# Allegro board Sensor_RevA2-1.brd
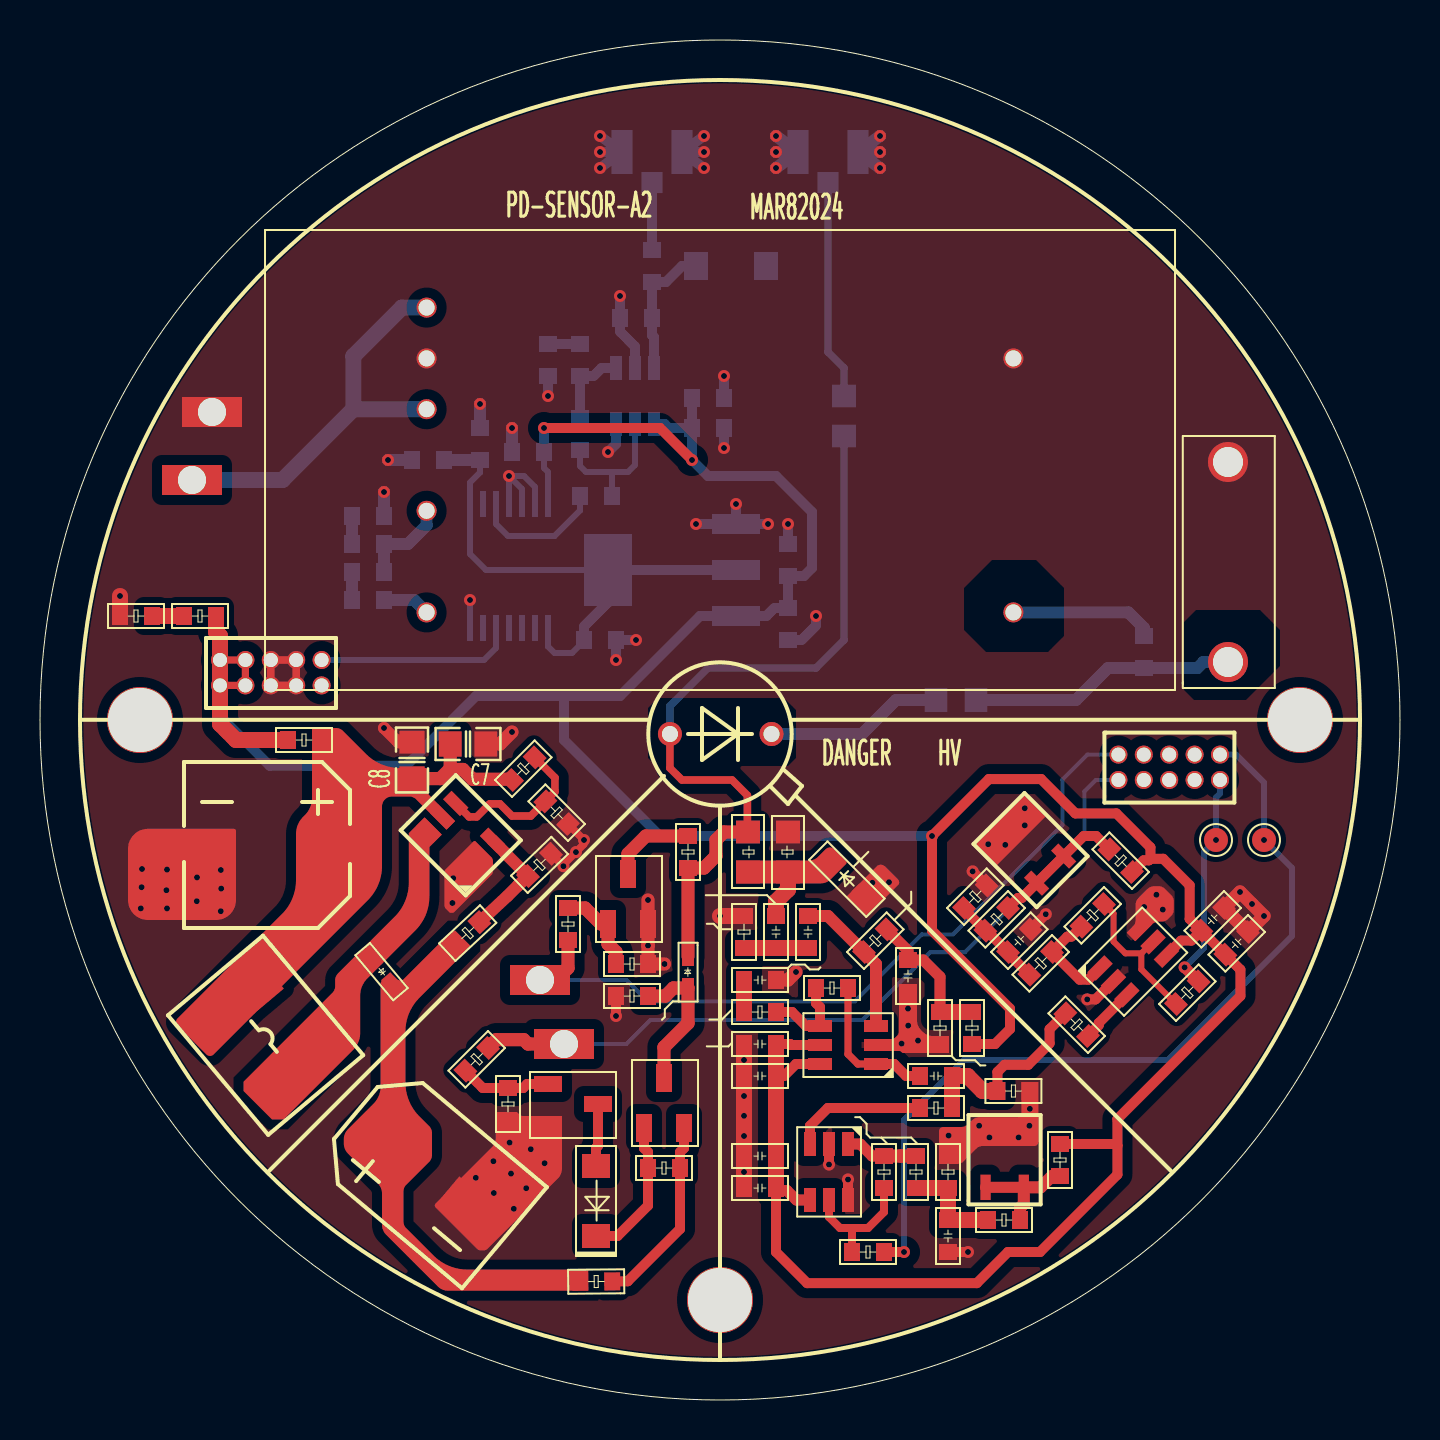
[diagram p0: board, top side]
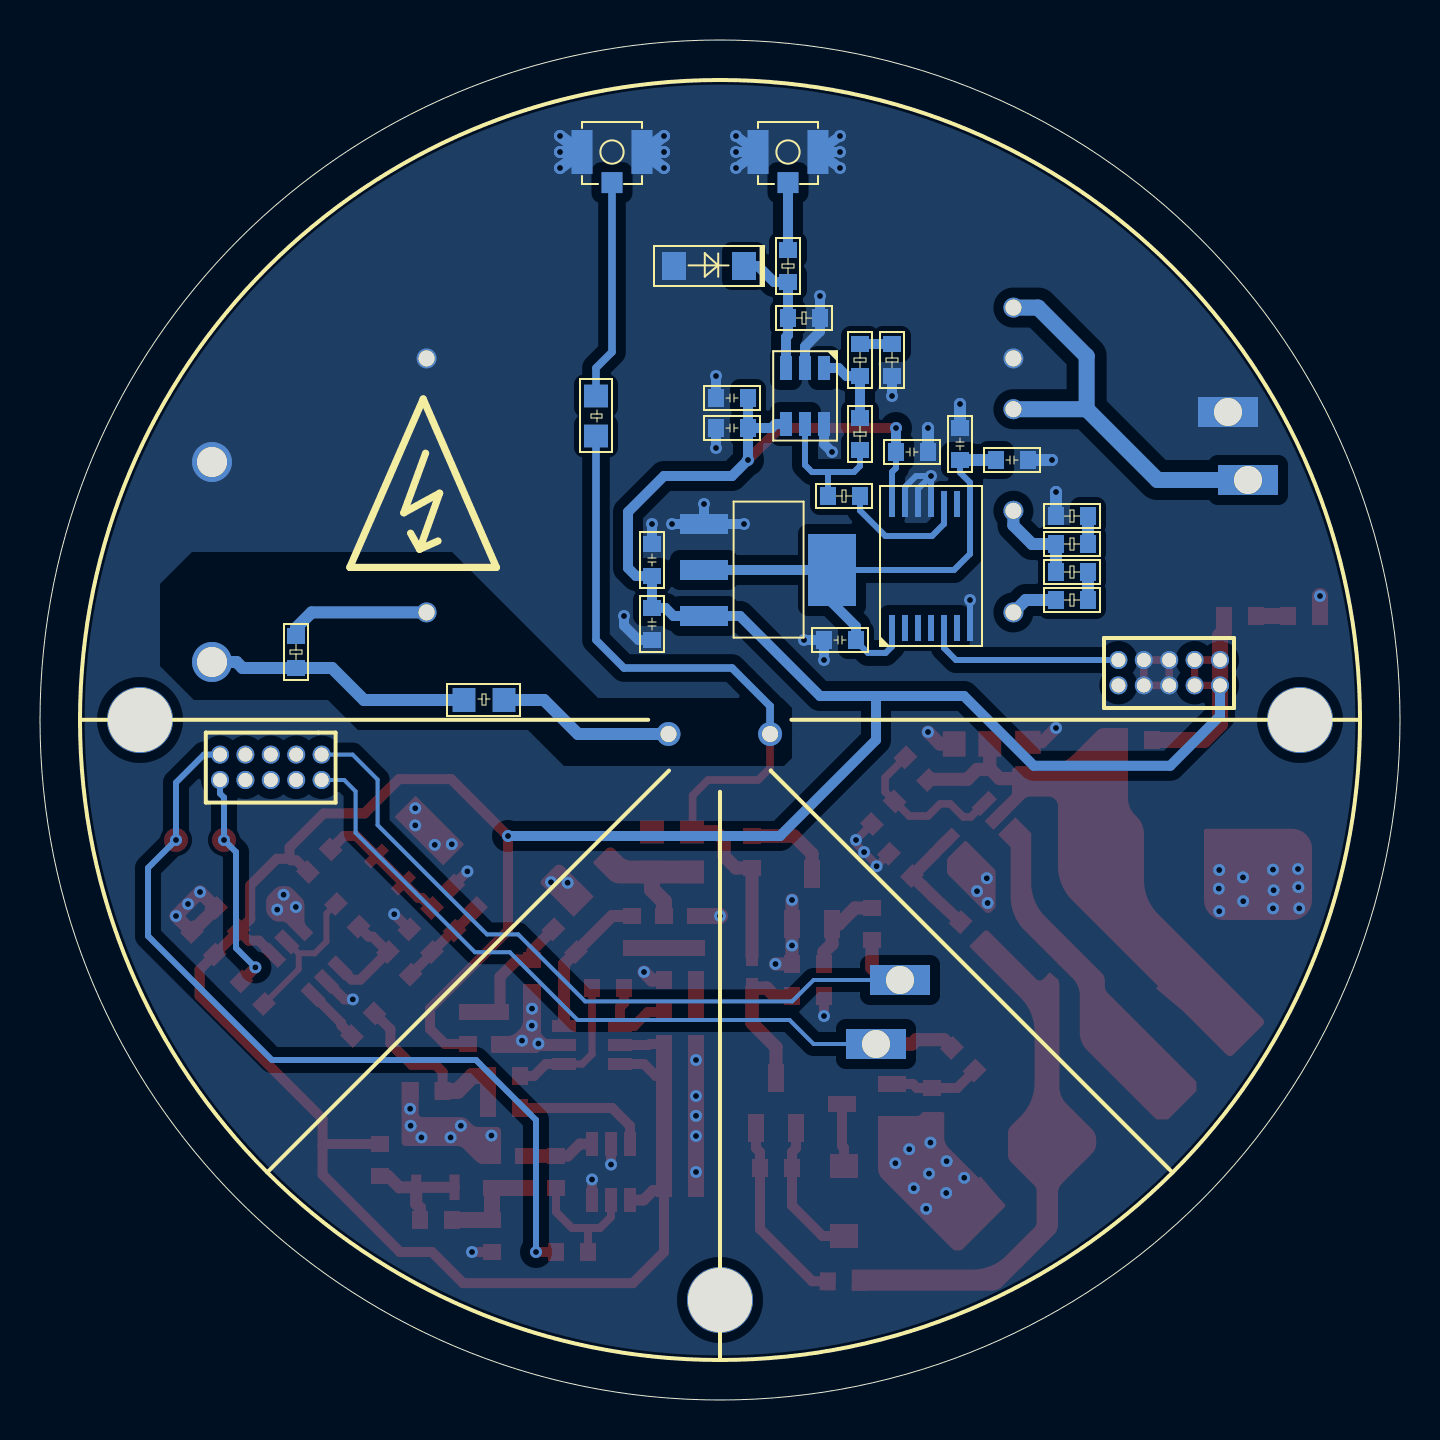
[diagram p1: board, bottom side, seen from below]

Outline 68 x 68 mm; copper layers: TOP, BOTTOM. Coordinates in mm from the lower left corner of the outline.
Outline path: circle c34,34 r34

## Design rules (mm)
constraint set DEFAULT: 

## Placement (name value [footprint] x y rotation side)
C7  10uF/35V  [C0805]  21.4 32.8 0 top
C8  10uF/35V  [C0805]  18.6 32 90 top
C9  220uF/35V  [CAP-SMD-D8D0-L8D3-W8D3-P7D5]  15 27.8 180 top
C10  10uF/16V  [C0603]  59.2 24.6 225 top
C11  0.1uF/16V  [C0603]  36.8 22.6 90 top
C12  0.1uF/16V  [C0603]  38.4 24.2 270 top
C13  0.1uF/16V  [C0603]  48.4 22.4 45 top
C14  0.1uF/16V  [C0603]  60.4 23.4 225 top
C15  0.1uF/16V  [C0603]  43.4 22 270 top
C16  0.1uF/16V  [C0603]  35.2 21 0 top
C17  0.1uF/16V  [C0603]  36.8 17.8 180 top
C18  10uF/16V  [C0603]  36.8 16.2 180 top
C19  0.1uF/16V  [C0603]  45.6 16.2 180 top
C20  0.1uF/16V  [C0603]  36.8 12.2 180 top
C21  100uF/35V  [CAP-SMD-L6D6-W6D6-P5D5-MM]  17.4 13 320 top
C22  10uF/16V  [C0603]  36.8 10.6 180 top
C23  0.1uF/16V  [C0603]  45.4 9 270 top
C24  0.1uF/630V  [MPP472J630V]  59.4 36.9 90 top
C25  10uF/16V  [C0603]  34.2 48.6 180 bottom
C26  0.1uF/16V  [C0603]  34.2 50.1 180 bottom
C27  10uF/16V  [C0603]  37.4 39.6 270 bottom
C28  0.1uF/16V  [C0603]  37.4 41.2 90 bottom
C29  10uF/16V  [C0603]  22 48.6 270 bottom
C30  0.1uF/16V  [C0603]  18.6 47 0 bottom
C64  0.1uF/16V  [C0603]  28.8 38 180 bottom
C65  0.1uF/16V  [C0603]  25.2 47.4 180 bottom
D2  LED  [R0603]  4 39.2 0 top
D3  SAPD  [SAPD-THR-2P]  34 33.3 0 top
D4  PTVSLC3D3V3B  [SOD323-L1D8-W1D3-P2D4-MM]  41.2 25.2 135 top
D5  BAS521-7  [SOD-523-L1D2-W0D8-P1D6-MM]  17.6 20.8 130 top
D6  BAS521-7  [SOD-523-L1D2-W0D8-P1D6-MM]  32.4 22.2 270 top
D7  MMSZ12T1G  [SOD-123-L2D8-W1D8-P3D5-MM]  27.8 8.2 90 top
D8  BAS521-7  [SOD-123-L2D8-W1D8-P3D5-MM]  32.8 56.7 0 bottom
J1  Conn-2x5  [CONN-2X5-1D27]  9 37 0 top
J2  Conn-2x5  [CONN-2X5-1D27]  53.92 32.27 0 top
J3  BWU.FL-IPEX1  [BWU-FL-IPEX1]  39.4 62.4 90 bottom
J4  BWU.FL-IPEX1  [BWU-FL-IPEX1]  30.6 62.4 90 bottom
L3  47uH/1A  [IND-SMD-L5D0-W5D0-P4D6-MM]  9.8 20 310 top
NOREF  -  []  64.24 35.01 0 top
NOREF#2  -  []  3.87 44.79 0 top
NOREF#3  -  [unnamed#2]  63 34 0 top
NOREF#4  -  []  34 5 90 top
NOREF#5  -  []  1.06 42.42 0 top
NOREF#6  -  []  5 34 0 top
NOREF#7  -  []  5 34 0 top
NOREF#8  -  [unnamed#2]  34 5 0 top
NOREF#9  -  [unnamed#2]  5 34 0 top
Q2  FH3400C  [SOT-23-3-L2D9-W1D3-P1D9-MM]  30.4 23.8 270 top
Q3  AO3401A  [SOT-23-3-L2D9-W1D3-P1D9-MM]  32.2 13.6 270 top
Q4  FH3400C  [SOT-23-3-L2D9-W1D3-P1D9-MM]  25.4 13.8 180 top
R8  2K  [R0603]  7.2 39.2 0 top
R11  100K  [R0805]  44.8 35 0 bottom
R12  0  [R0603]  12.4 33 0 top
R13  10K  [R0603]  23.6 31 45 top
R14  DNP  [R0603]  26.4 28.8 135 top
R15  0  [R0805]  35.4 26.4 90 top
R16  0  [R0603]  32.4 28.2 270 top
R17  1.3K  [R0805]  37.4 28.4 270 top
R18  499  [R0603]  54.6 26.4 135 top
R19  10K  [R0603]  24.4 26.2 44 top
R20  4.99K  [R0603]  46.2 24.6 45 top
R21  DNP  [R0603]  53.2 24.8 225 top
R22  10K  [R0603]  48.4 24.6 225 top
R23  100  [R0603]  26.4 23 90 top
R24  100K  [R0603]  35.2 22.6 90 top
R25  182K  [R0603]  20.8 22.8 43 top
R26  100K  [R0603]  41.2 22.4 45 top
R27  1K  [R0603]  50.6 22.4 225 top
R28  1K  [R0603]  28.8 21.8 0 top
R29  100K  [R0603]  40.4 20.6 180 top
R30  1K  [R0603]  56.8 19.8 45 top
R31  1M  [R0603]  28.8 20.2 0 top
R32  10K  [R0603]  35.2 19.4 0 top
R33  0  [R0603]  52.4 18.2 135 top
R34  4.99K  [R0603]  45 17.8 90 top
R35  4.99K  [R0603]  46.6 19.4 270 top
R36  100  [R0603]  22.4 17.6 225 top
R37  100K  [R0603]  49.47 15.45 180 top
R38  1K  [R0603]  23.4 15.6 270 top
R39  0  [R0603]  44 14.6 0 top
R40  499  [R0603]  51 12.8 270 top
R41  1K  [R0603]  32 11.6 180 top
R42  DNP  [R0603]  42.2 10.6 90 top
R43  1K  [R0603]  43.8 12.2 270 top
R44  4.99K  [R0603]  45.4 10.6 90 top
R45  4.99K  [R0603]  49 9 180 top
R46  1K  [R0603]  40.6 7.4 0 top
R47  0  [R0603]  28.61 5.93 180.5 top
R48  0  [R0603]  17.2 40 180 bottom
R50  2K  [R0603]  55.2 36.6 90 bottom
R51  2.4K  [R0603]  15.6 41.4 0 bottom
R53  9.1K  [R0603]  15.6 42.8 0 bottom
R54  0  [R0603]  17.2 44.2 180 bottom
R55  0  [R0805]  40.2 48.2 90 bottom
R57  1K  [R0603]  28.6 45.2 180 bottom
R58  50  [R0603]  30.6 57.5 270 bottom
R59  50  [R0603]  30.6 54.1 180 bottom
R60  0  [R0603]  27 51.2 90 bottom
R61  0  [R0603]  25.4 52.8 270 bottom
R62  DNP  [R0603]  27 47.5 90 bottom
TP4  RESET  [STAMP_HOLE_1D5X3D0_1D4]  25 21 90 top
TP5  QUENCH  [STAMP_HOLE_1D5X3D0_1D4]  26.2 17.8 270 top
TP6  PULSE2  [TP_SMD_1D2]  58.8 28 138 top
TP7  PULSE  [TP_SMD_1D2]  61.2 28 180 top
TP8  12V  [STAMP_HOLE_1D5X3D0_1D4]  7.6 46 90 top
TP9  12V  [STAMP_HOLE_1D5X3D0_1D4]  8.6 49.4 90 top
U2  MAX5026EUT-T  [SOT23-6]  21 28.2 45 top
U3  TL431  [SOT-23-3-TL431]  49.8 25.2 45 top
U4  TLV3501AIDBVR  [SOT-23-6-L2D9-W1D6-PD0D95-CD2D8-MM]  53 21.6 45 top
U5  OPA357AIDBVR  [SOT-23-6-L2D9-W1D6-PD0D95-CD2D8-MM]  41.8 16.8 180 top
U6  TL431  [SOT-23-3-TL431]  46.8 10.2 0 top
U7  TLV3501AIDBVR  [SOT-23-6-L2D9-W1D6-PD0D95-CD2D8-MM]  40.4 12.8 270 top
U8  -  [H01-P401V-5C]  34 47 0 top
U9  TLV3501AIDBVR  [SOT-23-6-L2D9-W1D6-PD0D95-CD2D8-MM]  28.8 51.6 270 bottom
U10  AMS-1117-3.3V  [SOT-223-3]  34.8 39.2 0 bottom
U11  LSF0204PW-Q100J  [TSSOP-14]  25.4 38.6 90 bottom

## Library data of the parts
C7 C8 C10-C20 C22 C23 C25-C30 C64 C65 = CAP NP
C9 C21 C24 = C
D2 = LED
D3 D5 D6 = DIODE
D4 = DIODE SCHOTTKY
D7 D8 = DIODE ZENER
J1 J2 = Conn-2x5
J3 J4 = IPEX
L3 = INDUCTOR
Q2 Q4 = FH3400C
Q3 = BSP316P_0
R8 R11-R48 R50 R51 R53-R55 R57-R62 = R
TP4-TP9 = T POINT F
U2 = MAX5026EUT-T
U3 U6 = TL431/TI
U4 U7 U9 = TLV3501AIDBVR
U5 = OPA357AIDBVR
U8 = H01-P401V-5C
U10 = AMS-1117-3.3V
U11 = LSF0204PW-Q100J

## Footprints (pads in the part's own frame, mm; a bottom-side part is the same pattern mirrored in y, then rotated)
BWU-FL-IPEX1
  rect 2.2x1.05 smd: 1(0,1.5) 2(0,-1.5)
  rect 1.05x1.05 smd: 3(-1.53,0)
C0603
  rect 0.8x0.9 smd: 1(0,0) 2(1.6,0)
C0805
  rect 1.141x1.27 smd: 1(-0.889,0) 2(0.889,0)
CAP-SMD-D8D0-L8D3-W8D3-P7D5
  rect 4.2x1.4 smd: 1(0,0) 2(7.5,0)
CAP-SMD-L6D6-W6D6-P5D5-MM
  rect 3.2x1.8 smd: 1(0,0) 2(5.5,0)
CONN-2X5-1D27
  round 0.9 hole 0.7: 1(0,0) 2(0,-1.27) 3(1.27,0) 4(1.27,-1.27) 5(2.54,0) 6(2.54,-1.27) 7(3.81,0) 8(3.81,-1.27) 9(5.08,0) 10(5.08,-1.27)
H01-P401V-5C
  round 1 hole 0.8: 1(-14.67,7.62) 2(-14.67,5.08) 3(-14.67,2.54) 4(-14.67,-2.54) 5(-14.67,-7.62) 6(14.67,-7.62) 7(14.67,5.08)
IND-SMD-L5D0-W5D0-P4D6-MM
  rect 2.2x4.4 smd: 1(0,0) 2(4.6,0)
MPP472J630V
  round 2 hole 1.5: 1(0,0) 2(10,0)
R0603
  rect 0.8x0.9 smd: 1(0,0) 2(1.6,0)
R0805
  rect 1.14x1.2 smd: 1(0,0) 2(2,0)
SAPD-THR-2P
  round 1.2 hole 0.8: 1(2.576,0) 2(-2.504,0)
SOD323-L1D8-W1D3-P2D4-MM
  rect 1.2x0.6 smd: 1(0,0) 2(2.4,0)
SOD-123-L2D8-W1D8-P3D5-MM
  rect 1.2x1.4 smd: 1(0,0) 2(3.5,0)
SOD-523-L1D2-W0D8-P1D6-MM
  rect 1x0.6 smd: 1(0,0) 2(1.6,0)
SOT23-6
  rect 0.6x1.2 smd: 1(-0.9,-1.3) 2(0.05,-1.3) 3(1,-1.3) 4(1,1.3) 5(0.05,1.3) 6(-0.9,1.3)
SOT-23-3-L2D9-W1D3-P1D9-MM
  rect 1.4x0.8 smd: 1(0,-2) 2(0,0) 3(-2.5,-1)
SOT-23-3-TL431
  rect 0.51x1.27 smd: 1(0.476,0.434) 2(1.415,3.142) 3(2.391,0.434)
SOT-23-6-L2D9-W1D6-PD0D95-CD2D8-MM
  rect 1.2x0.6 smd: 1(0,0) 2(0,-0.95) 3(0,-1.9) 4(2.8,-1.9) 5(2.8,-0.95) 6(2.8,0)
SOT-223-3
  rect 2.4x1 smd: 1(0,-4.6) 2(0,-2.3) 3(0,0)
  rect 2.4x3.6 smd: 4(-6.4,-2.3)
STAMP_HOLE_1D5X3D0_1D4
  rect 1.5x3 hole 1.4: 1(0,0)
TP_SMD_1D2
  round 1.2 smd: 1(0,0)
TSSOP-14
  rect 1.3x0.3 smd: 1(0,0) 2(0,-0.65) 3(0,-1.3) 4(0,-1.95) 5(0,-2.6) 6(0,-3.25) 7(0,-3.9) 8(6.2,-3.9) 9(6.2,-3.25) 10(6.2,-2.6) 11(6.2,-1.95) 12(6.2,-1.3) 13(6.2,-0.65) 14(6.2,0)
unnamed#2
  round 3.3 hole 3.2 unplated: (0,0)

## Nets
2V5: R48.1 U8.5(VREF)
GND: C7.2 C8.2 C9.2 C10.1 C13.2 C14.1 C15.2 C16.2 C17.2 C18.2 C20.2 C21.2 C22.2 C23.2 C24.2 C25.1 C26.1 C27.2 C28.2 C29.1 C30.1 C64.1 C65.2 D2.1(CATHODE) D4.1 D8.2 J1.5 J1.6 J1.7 J1.8 J3.1 J3.2 J4.1 J4.2 Q2.2(S) Q4.2(S) R14.1 R17.1 R19.2 R20.2 R24.2 R28.2 R31.1 R34.1 R37.1 R38.2 R44.2 R54.1 R59.2 R61.2 TP9.1(TP) U2.1 U2.2 U3.2 U4.2(V-) U4.6 U5.2(V-) U6.2 U7.2(V-) U7.6 U8.2 U8.7 U9.2(V-) U9.6 U10.1 U11.7 U11.11 U11.12 U11.13
VDD5: C10.2 C14.2 C17.1 C18.1 C20.1 C22.1 C25.2 C26.2 C27.1 C28.1 C65.1 J1.1 J1.2 J1.3 J1.4 R8.2 R12.1 R18.1 R35.2 R40.1 U4.4 U5.5 U5.6 U7.4 U9.4 U10.3 U11.14(REFB)
VDD12: TP8.1(TP) U8.1 U8.3
VDD33: C29.2 C30.2 C64.2 U10.2 U10.4(VOUT#4) U11.1 U11.8
PULSE: J2.9 R46.2 TP7.1(TP)
PULSE2: J2.10 R30.2 TP6.1(TP)
QUENCH_VOLTAGE_DOWN: J2.2 R36.1 TP5.1(TP)
RESET_DISCHARGE: J2.1 R23.1 TP4.1(TP)
VBIAS: C24.1 R11.2 R50.1
VQUENCH: C21.1 D5.1(K) R25.1 R47.2
ZERO_CROSS: R57.2 U11.10
ZERO_CROSS_3V3: J1.9 U11.5
N365385: C7.1 C8.1 C9.1 L3.1 R12.2 R13.1 U2.5(VCC)
N365393: D5.2 L3.2 U2.6
N365573: R13.2 R14.2 U2.4
N365581: R19.1 R25.2 U2.3
N370892: Q3.2(S) R41.1 R47.1
N370992: D7.1(CATHODE) Q3.1 R41.2
N371048: D7.2 Q4.3
N371052: D3.2 D6.1(K) R15.2 R16.2 R55.1
N371122: D6.2 Q3.3 R31.2
N371190: Q4.1 R36.2 R38.1
N371268: C11.2 D4.2(CATHODE) R15.1 R17.2
N371272: Q2.3 R16.1
N371414: Q2.1 R23.2 R28.1
N371666: C11.1 C12.2 R24.1
N371936: R42.1 R46.1 U7.5
N371974: C23.1 R43.2 R44.1 R45.2
N372070: R40.2 R45.1 U6.1(REF) U6.3
N379806: C15.1 R26.2 R34.2 R35.1
N380805: C12.1 R26.1 U5.3
N381019: R29.2 R32.2 U5.4
N381074: C19.2 R29.1 U5.1
N381200: C16.1 R32.1
N382559: C19.1 R33.2 R37.2 R39.2
N382943: D3.1(K) R11.1
N497700: R42.2 R43.1 U7.1
N497855: R39.1 U7.3
N499181: R21.2 R27.1 U4.1
N499185: R21.1 R30.1 U4.5
N500750: C13.1 R20.1 R22.2 R27.2
N500844: R18.2 R22.1 U3.1(REF) U3.3
N502146: R33.1 U4.3
N518424: R51.2 R53.2 U8.4
N518432: R50.2 U8.6
N518512: R48.2 R51.1
N518576: R53.1 R54.2
N519694: D2.2 R8.1
N520234: J3.3 R55.2
N523027: D8.1(CATHODE) R58.2 R59.1 U9.3
N523749: J4.3 R58.1
N527837: R57.1 R62.1 U9.5
N533450: R60.2 R61.1
N533543: R60.1 R62.2 U9.1

Pads without a net: J1 10; J2 3 4 5 6 7 8; U11 2 3 4 6 9

## Via types
v1: diameter 0.6, hole 0.3, TOP to BOTTOM, 105 vias

## Routing (per net, layer and track width the routed paths; a pad name or vN(x,y) marks a point on that pad's centre or on a via; arc(x,y) is an arc through that point)
2V5: length 2.4
  BOTTOM w0.6: R48.1 18.71,40 U8.5
GND: length 85.4
  TOP w0.38: R19.2 26.13,26.73 26.13,26.73 v1(26.17,26.69) 26.21,26.73 26.21,26.81 v1(26.8,27.39) 26.8,27.4 27.18,27.78 27.18,27.98 v1(27.2,28) R14.1 ; J1.7 J1.8 J1.6 J1.5 J1.7
  TOP w0.5: R20.2 v1(46.63,26.43) ; R31.1 v1(28.8,19.2) ; U7.2 v1(39.45,11.77) ; U4.2 52.77,20.03 v1(52.36,20.03) ; C23.2 v1(46.4,7.4) ; C13.2 v1(50.29,24.29) ; U7.6 v1(40.4,11.03)
  TOP w0.6: C8.2 17.91,32.89 v1(17.2,33.6)
  TOP w0.66: C16.2 37.4,21 v1(37.8,21.4) ; v1(30.4,25) Q2.2 v1(30.4,22.72) 30.4,22.72 R28.2 v1(31.23,21.8) ; C7.2 23,32.8 v1(23.6,33.4) ; v1(60,25.4) v1(60.6,24.8) v1(61.2,24.2) C14.1 C10.1 v1(60,25.4)
  TOP w0.8: R24.2 v1(34,24.2) ; D2.1 v1(4,40.2) ; C17.2 v1(35.2,17) C18.2 v1(35.2,15.2) v1(35.2,14.21) v1(35.2,13.2) C20.2 v1(35.2,11.4) C22.2
  BOTTOM w0.3: U11.12 24.1,45.55 v1(23.45,46.2) ; U11.13 24.75,45.65 24.2,46.2 v1(23.45,46.2) ; v1(23.45,46.2) U11.11 ; U11.7 v1(21.5,40)
  BOTTOM w0.5: J4.2 v1(28,61.6) ; J4.2 v1(28,63.2) ; J4.2 v1(28,62.4) ; C27.2 38.08,38 38.8,38.72 v1(38.8,39.2) ; R61.2 v1(25.4,50.2) ; J4.1 v1(33.2,62.4) ; J4.1 v1(33.2,63.2) ; J4.1 v1(33.2,61.6) ; v1(29.8,38) C64.1 v1(28.8,37) ; C26.1 v1(34.2,51.2) ; v1(28.4,47.4) 28.8,47.8 U9.6 ; v1(29,55.2) R59.2 29,53.42 29.75,52.67 U9.2 ; U10.1 v1(36.4,43.8) ; U10.1 v1(34.8,44.8) ; U10.1 v1(32.8,43.8) ; C25.1 v1(34.2,47.6) ; C28.2 v1(37.4,43.8)
  BOTTOM w0.6: J3.1 v1(42,62.4) ; J3.1 v1(42,63.2) ; J3.1 v1(42,61.6) ; R54.1 v1(17.2,45.4) ; J3.2 v1(36.8,62.4) ; J3.2 v1(36.8,63.2) ; J3.2 v1(36.8,61.6) ; C65.2 v1(23.6,48.6) ; C30.1 v1(17.4,47) ; C29.1 v1(22,49.8)
  vias: v1(5.04,24.58) v1(5.1,26.55) v1(5.08,25.64) v1(6.32,25.49) v1(6.35,26.52) v1(6.35,24.58) v1(7.84,24.94) v1(7.85,26.13) v1(9.04,26.5) v1(9.04,24.44) v1(9.06,25.57) v1(20.62,24.85) v1(20.66,26.09) v1(21.15,25.44) v1(21.79,11.11) v1(22.67,11.94) v1(22.69,10.35) v1(23.48,12.87) v1(23.55,11.32) v1(23.69,9.56) v1(24.31,10.59) v1(24.54,12.54) v1(25.23,11.84) v1(41.62,25.86) v1(42.45,25.89) v1(43.08,17.82) v1(43.4,19.57) v1(43.41,18.72) v1(43.9,17.97) v1(45.43,13.22) v1(46.96,13.71) v1(47.41,27.79) v1(47.47,13.13) v1(48.26,27.76) v1(48.93,13.13) v1(49.24,29.59) v1(49.24,28.73) v1(49.49,14.56) v1(49.47,13.71) v1(55.21,24.65) v1(55.82,25.26) v1(56.14,24.52)
VDD5: length 191.1
  TOP w0.36: J1.1 J1.3 J1.4 J1.2
  TOP w0.5: R18.1 55.18,26.98 55.44,26.98 55.52,27.06 ; C22.1 36.8,7.4 38.36,5.84 46.84,5.84 48.4,7.4 50,7.4 53.87,11.27 53.87,12.72 ; U5.6 37.8,16.8 37.2,16.2 C18.1 ; U5.5 37.56,17.75 37.51,17.8 C17.1 ; 55.52,27.06 55.52,27.63 53.82,29.33 51.77,29.33 50.05,31.05 47.45,31.05 v1(44.6,28.2) 44.6,23.47 48.5,19.57 48.5,18.55 47.75,17.8 R35.2 ; 55.52,27.06 56.16,27.06 57.48,25.74 57.48,24.05 C10.2 ; C10.2 C14.2 60.02,21.52 60.02,20.2 53.87,14.05 53.87,12.72 ; C10.2 57.57,22.97 57.06,22.97 U4.4 ; v1(25.2,48.6) 31,48.6 v1(32.6,47) ; R40.1 53.79,12.8 53.87,12.72
  TOP w0.55: 36.8,10.47 37.35,10.47 37.82,10 U7.4
  TOP w0.8: R12.1 9.8,33 9,33.8 J1.2 J1.1 9,38.2 8.8,38.4 R8.2 ; C17.1 C18.1 C20.1 C22.1
  BOTTOM w0.3: C65.1 25.2,46.6 25.4,46.4 U11.14
  BOTTOM w0.5: C25.2 v1(32.6,47) 33.4,46.2 36.8,46.2 38.6,44.4 38.6,41.6 38.2,41.2 C28.1 C27.1 36.72,39.6 36.32,39.2 U10.3 33,39.2 29,35.2 26.2,35.2 ; C25.2 31.43,48.6 31.23,48.8 U9.4 ; C25.2 C26.2 ; 26.2,35.2 26.2,33 31,28.2 v1(44.6,28.2) ; 26.2,35.2 21.8,35.2 18.31,31.71 11.49,31.71 9,34.2 J1.2 ; C65.1 v1(25.2,48.6)
VDD12: length 20.5
  BOTTOM w0.8: 15.67,49.54 12.13,46 TP8.1 ; 15.67,49.54 U8.3 ; 15.67,49.54 15.67,52.19 18.09,54.62 U8.1
VDD33: length 27.5
  BOTTOM w0.3: U11.1 25.4,37.67 25.72,37.35 26.6,37.35 27.2,37.95 C64.2 ; U10.4 22.3,41.5 21.5,42.3 U11.8 21.5,45.87 22,46.37 C29.2
  BOTTOM w0.5: U10.2 U10.4 28.4,39.88 27.2,38.68 C64.2
  BOTTOM w0.6: C30.2 21.32,47 21.32,47 C29.2
PULSE: length 41.8
  TOP w0.5: R46.2 v1(43.2,7.4)
  BOTTOM w0.3: v1(43.2,7.4) 43.2,14 46.2,17 56.4,17 62.6,23.2 62.6,26.6 v1(61.2,28) 61.2,30.87 59.8,32.27 J2.9
PULSE2: length 11.1
  TOP w0.55: R30.2 v1(57.23,21.63)
  BOTTOM w0.3: J2.10 59,30.32 58.8,30.12 v1(58.8,28) 58.2,27.4 58.2,22.6 v1(57.23,21.63)
QUENCH_VOLTAGE_DOWN: length 38.5
  TOP w0.66: R36.1 22.82,18.02 24.18,18.02 24.4,17.8 TP5.1
  BOTTOM w0.2: J2.2 52.79,31 52.22,30.43 52.22,28.36 46.25,22.39 44.51,22.39 41.12,19 30.52,19 29.32,17.8 TP5.1
RESET_DISCHARGE: length 38.9
  TOP w0.66: TP4.1 25.8,21 26.4,21.6 R23.1
  BOTTOM w0.2: J2.1 52.37,32.27 51.12,31.02 51.12,28.75 45.65,23.28 44.09,23.28 40.74,19.93 30.39,19.93 29.32,21 TP4.1
VBIAS: length 13.4
  BOTTOM w0.6: C24.1 58.17,36.9 57.87,36.6 R50.1 53.4,36.6 51.8,35 R11.2
ZERO_CROSS: length 6.7
  BOTTOM w0.3: R57.2 27,44.47 25.73,43.2 23.4,43.2 22.8,43.8 U11.10
ZERO_CROSS_3V3: length 10
  BOTTOM w0.3: J1.9 22.2,37 22.8,37.6 U11.5
N365385: length 6.7
  TOP w0.66: 20.47,31.53 20.02,31.07 18.64,31.07 ; 20.47,31.53 20.51,31.56 C7.1 ; 20.47,31.53 21.14,31.53 21.63,31.04 23.56,31.04 R13.1
N365573: length 8.4
  TOP w0.38: R13.2 25.75,31.12 25.75,30.41 R14.2 24.54,29.2 23.6,29.2 22.99,29.81 22.49,29.81 21.84,29.16 21.46,29.16 U2.4
N365581: length 5.9
  TOP w0.6: R25.2 23.37,25.2 23.88,25.71 23.89,25.71 R19.1 23.27,27.33 23.27,27.35 U2.3
N370892: length 9.6
  TOP w0.5: R47.1 29.39,5.94 32,8.55 R41.1 32,12.39 32.2,12.59 Q3.2
N370992: length 7.2
  TOP w0.5: D7.1 28.88,8.2 30.4,9.72 R41.2 30.4,12.39 30.2,12.59 Q3.1
N371048: length 3.1
  TOP w0.5: Q4.3 27.9,12.71 27.8,12.61 D7.2
N371052: length 38.3
  TOP w0.38: D3.2 31.5,31.6 32.1,31 34.6,31 35.37,30.23 35.37,28.4
  TOP w0.66: D6.1 R16.2 33.2,26.6 33.8,27.2 33.8,28 34.2,28.4 R15.2
  BOTTOM w0.38: R55.1 40.2,38 38.8,36.6 33.4,36.6 31.5,34.7 D3.2
N371122: length 7.2
  TOP w0.66: Q3.3 31.2,17.64 32.4,18.84 D6.2 31.67,20.6 31.27,20.2 R31.2
N371190: length 4.6
  TOP w0.5: Q4.1 24.36,15.8 24.16,15.6 R38.1 22.14,15.6 R36.2
N371268: length 2.4
  TOP w0.8: R17.2 37.4,25.52 36.8,24.92 C11.2
N371272: length 4.4
  TOP w0.66: R16.1 30.29,28.2 29.4,27.31 Q2.3
N371414: length 4.5
  TOP w0.66: R28.1 28.8,22.4 28.4,22.8 Q2.1 28.05,23.8 27.25,24.6 R23.2
N371666: length 3.2
  TOP w0.8: R24.1 C11.1 37.64,22.6 37.64,22.6 C12.2
N371936: length 6.6
  TOP w0.4: R46.1 40.6,8.6 ; 40.6,8.6 40,8.6 39.45,9.15 U7.5 ; 40.6,8.6 41.4,8.6 42.2,9.4 R42.1
N371974: length 5.2
  TOP w0.8: R43.2 44.64,10.6 44.64,10.6 R44.1 C23.1 R45.2
N372070: length 5.7
  TOP w0.55: U6.1 U6.3
  TOP w0.6: R40.2 50.6,11.2 50.03,10.63 U6.3 49.19,9.8 49,9.61 R45.1
N379806: length 7.3
  TOP w0.55: R26.2 43.4,22.46 C15.1 44.16,22 45,21.16 R34.2
  TOP w0.8: R34.2 45.76,19.4 45.76,19.4 R35.1
N380805: length 7.5
  TOP w0.6: C12.1 39.4,24.2 R26.1 41.8,21.8 U5.3
N381019: length 4.5
  TOP w0.5: R29.2 38.8,19.84 39,19.64 U5.4 38.3,18.7 37.6,19.4 R32.2
N381074: length 7.4
  TOP w0.36: U5.1 40.89,16.8 40.4,17.29 R29.1
  TOP w0.5: C19.2 43.31,16.2 42.71,16.8 U5.1
N381200: length 1.6
  TOP w0.8: R32.1 C16.1
N382559: length 10.2
  TOP w0.5: R33.2 50.48,18.54 50.48,17.83 49.41,16.76 48.23,16.76 47.87,16.4 R37.2
  TOP w0.8: R39.2 45.6,15.36 45.6,15.36 C19.1 46.38,16.2 47.13,15.45 R37.2
N382943: length 8.9
  BOTTOM w0.6: D3.1 41.1,33.3 42.8,35 R11.1
N497700: length 3.6
  TOP w0.55: R42.2 41.61,12.2 41.01,12.8 U7.1
  TOP w0.66: R42.2 43.04,12.2 43.04,12.2 R43.1
N497855: length 6.8
  TOP w0.5: R39.1 39.39,14.6 38.5,13.71 U7.3
N499181: length 5.2
  TOP w0.5: R21.2 51.57,23.17 51.37,23.17 R27.1 51.98,21.02 52.42,21.02 U4.1
N499185: length 7.8
  TOP w0.3: R21.1 53.68,24.32 53.68,22.92 54.27,22.33 55.07,22.33 ; U4.5 55.64,22.91 55.07,22.33 ; R30.1 55.07,21.53 55.07,22.33
N500750: length 4.7
  TOP w0.5: R27.2 48.4,22.34 C13.1 47.33,23.47 R22.2 46.2,24.54 R20.1
N500844: length 6.8
  TOP w0.5: R22.1 48.9,25.1 49.09,25.1 U3.1 U3.3 52.19,28.2 52.8,28.2 R18.2
N502146: length 2.9
  TOP w0.5: U4.3 52.94,18.85 52.94,18.74 R33.1
N518424: length 4.6
  BOTTOM w0.6: U8.4 19.33,43.73 18.4,42.8 R53.2 R51.2
N518432: length 7.3
  BOTTOM w0.6: U8.6 54.42,39.38 55.2,38.6 R50.2
N518512: length 1.4
  BOTTOM w0.6: R48.2 15.6,40.68 15.6,40.68 R51.1
N518576: length 1.4
  BOTTOM w0.6: R53.1 15.6,43.52 15.6,43.52 R54.2
N519694: length 1.6
  TOP w0.8: D2.2 R8.1
N520234: length 11
  BOTTOM w0.38: R55.2 40.2,51.6 39.4,52.4 J3.3
N523027: length 6.9
  BOTTOM w0.5: U9.3 30.7,53.14 30.6,53.24 R59.1 R58.2 31.3,55.9 32.1,56.7 D8.1
N523749: length 3.4
  BOTTOM w0.5: J4.3 R58.1
N527837: length 7.1
  BOTTOM w0.3: 28.6,46.4 29.4,46.4 29.75,46.75 U9.5 ; 28.6,46.4 27.3,46.4 27,46.7 R62.1 ; 28.6,46.4 R57.1
N533450: length 1.6
  BOTTOM w0.5: R60.2 26.32,52.8 26.32,52.8 R61.1
N533543: length 4.1
  BOTTOM w0.5: R62.2 R60.1 27.68,51.2 28.08,51.6 U9.1

## Copper pours and planes (outline as drawn; the poured copper is in the pictures)
GND on TOP (solid shape): 50.27,29.16 47.84,26.73 46.79,27.78 49.22,30.21
GND on TOP (solid shape): 41.83,26.68 42.04,26.77 42.25,26.68 42.9,26.03 42.96,25.88 42.9,25.74 41.32,24.16 40.31,25.16
GND on TOP (solid shape): 43.85,19 43.91,18.72 44.06,18.49 44.14,18.41 44.37,18.26 44.65,18.2 45.45,18.2 45.45,17.35 43.17,17.35 43.12,17.36 43.08,17.39 43.06,17.41 43.02,17.44 42.97,17.45 41.2,17.45 41.2,18.05 42.59,18.05 42.68,18.07 42.76,18.12 42.88,18.24 42.93,18.32 42.95,18.41 42.95,20.8 43.85,20.8
GND on TOP (solid shape): 23.98,14.27 24.06,14.22 24.15,14.2 26.1,14.2 26.1,11.58 26.04,11.3 25.89,11.07 22.37,7.55 22.29,7.5 22.2,7.48 22.03,7.48 21.94,7.5 21.86,7.55 19.78,9.63 19.75,9.67 19.75,9.78 19.78,9.82 22.58,12.62 22.73,12.85 22.79,13.13 22.79,14.3 22.82,14.37 22.89,14.4 23.85,14.4
GND on TOP (solid shape): 49.92,12.9 49.86,12.76 49.72,12.7 47.15,12.7 46.97,12.66 46.81,12.56 46.19,11.94 46.03,11.84 45.85,11.8 44.95,11.8 44.95,13.45 45.01,13.59 45.15,13.65 46.07,13.65 46.25,13.69 46.41,13.79 46.62,14 46.78,14.1 46.96,14.14 48.87,14.14 49.01,14.2 49.07,14.34 49.07,15.9 49.92,15.9
GND on TOP: 2.17,34 65.83,34 ; 8 cut-outs
GND on BOTTOM: 2.23,34 65.77,34 ; 1 cut-out
VQUENCH on TOP (solid shape): 21.51,22.72 21.51,22.65 18.98,20.12 18.45,19.33 18.27,18.41 18.27,15.88 18.45,14.96 18.98,14.17 19.46,13.69 19.56,13.53 19.6,13.35 19.6,12.25 19.56,12.07 19.46,11.91 18.31,10.76 18.21,10.6 18.17,10.42 18.17,8.93 18.21,8.75 18.31,8.59 19.67,7.23 20.46,6.7 21.38,6.52 27.4,6.52 27.41,6.51 27.41,5.46 20.41,5.46 20.13,5.52 19.89,5.68 17.31,8.26 17.16,8.49 17.1,8.77 17.1,10.32 17.04,10.6 16.89,10.83 15.4,12.32 15.25,12.55 15.19,12.83 15.19,13.03 15.25,13.31 15.4,13.54 16.68,14.82 16.94,15.21 17.03,15.67 17.03,20.8 17.05,20.89 17.1,20.97 17.51,21.38 17.84,21.05 17.92,21 18.01,20.98 18.02,20.98 18.11,21 18.19,21.05 20.61,23.47 20.76,23.47
N365385 on TOP (solid shape): 14.8,33.6 14.98,33.56 15.14,33.46 16.29,32.31 17.08,31.78 18,31.6 19.3,31.6 19.37,31.57 19.4,31.5 19.4,30.4 19.42,30.31 19.47,30.23 20.75,28.95 20.32,28.52 18.81,30.03 18.65,30.14 18.46,30.18 17.6,30.18 17.25,30.03 17.1,29.68 17.1,26.7 16.92,25.78 16.39,24.99 8.67,17.27 8.59,17.22 8.5,17.2 8.41,17.22 8.33,17.27 6.87,18.73 6.82,18.81 6.8,18.9 6.82,18.99 6.87,19.07 12.09,24.29 12.62,25.08 12.8,26 12.8,28.3 12.89,28.76 13.15,29.15 13.25,29.25 13.51,29.64 13.6,30.1 13.6,33.6
N365393 on TOP (solid shape): 20.09,28.27 19.47,27.65 19.47,25.18 19.29,24.26 18.76,23.47 16.36,21.07 16.1,20.68 16.01,20.22 16.01,18.36 15.92,17.9 15.66,17.51 12.18,14.03 11.6,14.03 10.18,15.45 10.18,15.92 14.62,20.36 14.72,20.52 14.76,20.7 14.76,20.99 14.8,21.17 14.9,21.33 17.73,24.16 18.26,24.95 18.44,25.87 18.44,28.34 19.23,29.13
GND on TOP (solid shape): 21.65,27.91 21.72,27.94 21.79,27.91 22.58,27.12 22.63,27.04 22.65,26.95 22.65,26.43 22.63,26.34 22.58,26.26 20.72,24.4 20.68,24.37 20.63,24.36 20.54,24.36 20.49,24.37 20.45,24.4 20.29,24.56 20.24,24.64 20.22,24.73 20.22,26.38 20.24,26.47 20.29,26.55
GND on TOP (solid shape): 55.92,25.69 56.1,25.65 56.26,25.55 56.55,25.26 56.65,25.1 56.69,24.92 56.69,24.53 56.65,24.35 56.55,24.19 56.42,24.06 56.26,23.96 56.08,23.92 55.94,23.92 55.76,23.88 55.6,23.78 54.76,22.94 54.34,23.36 54.34,23.37 54.64,23.67 54.74,23.83 54.78,24.01 54.78,24.76 54.82,24.94 54.92,25.1 55.37,25.55 55.53,25.65 55.71,25.69
GND on TOP (solid shape): 9.7,28.56 9.77,28.53 9.8,28.46 9.8,25 9.51,24.29 8.8,24 5.4,24 4.69,24.29 4.4,25 4.4,27.56 4.69,28.27 5.4,28.56
N371268 on TOP (solid shape): 39.52,27.62 39.61,27.61 39.69,27.55 40.3,26.94 40.33,26.87 40.3,26.8 39.54,26.04 39.31,25.89 39.03,25.83 34.8,25.83 34.8,26.97 38.42,26.97 38.7,27.03 38.93,27.18 39.3,27.55 39.38,27.61 39.48,27.62

Small or netless copper shapes (teardrops, artwork), in the pictures only: 1 on TOP, 1 on BOTTOM

## Text on the board
Ref Des/Silkscreen Top: PD-SENSOR-A2 | MAR82024 | DANGER | HV
XSECTION_CHART: *  SURFACE | L1 TOP CONDUCTOR | *  DIELECTRIC | L2 BOTTOM CONDUCTOR | DESIGN CROSS SECTION CHART | ___________________________ | TOTAL THICKNESS 0.86096 MM | 1-2
DIMENSION: FIGURE | FINISHED_SIZE | 0.3 | 0.7 | 0.8 | 1.4 | 1.5 | 3.2 | DRILL CHART: TOP to BOTTOM | ALL UNITS ARE IN MILLIMETERS | PLATED | NON-PLATED | QTY | 105 | 20 | 7 | 2 | 4 | 3
